# EAGLE board Board_Com2 (EAGLE 8.2.1)
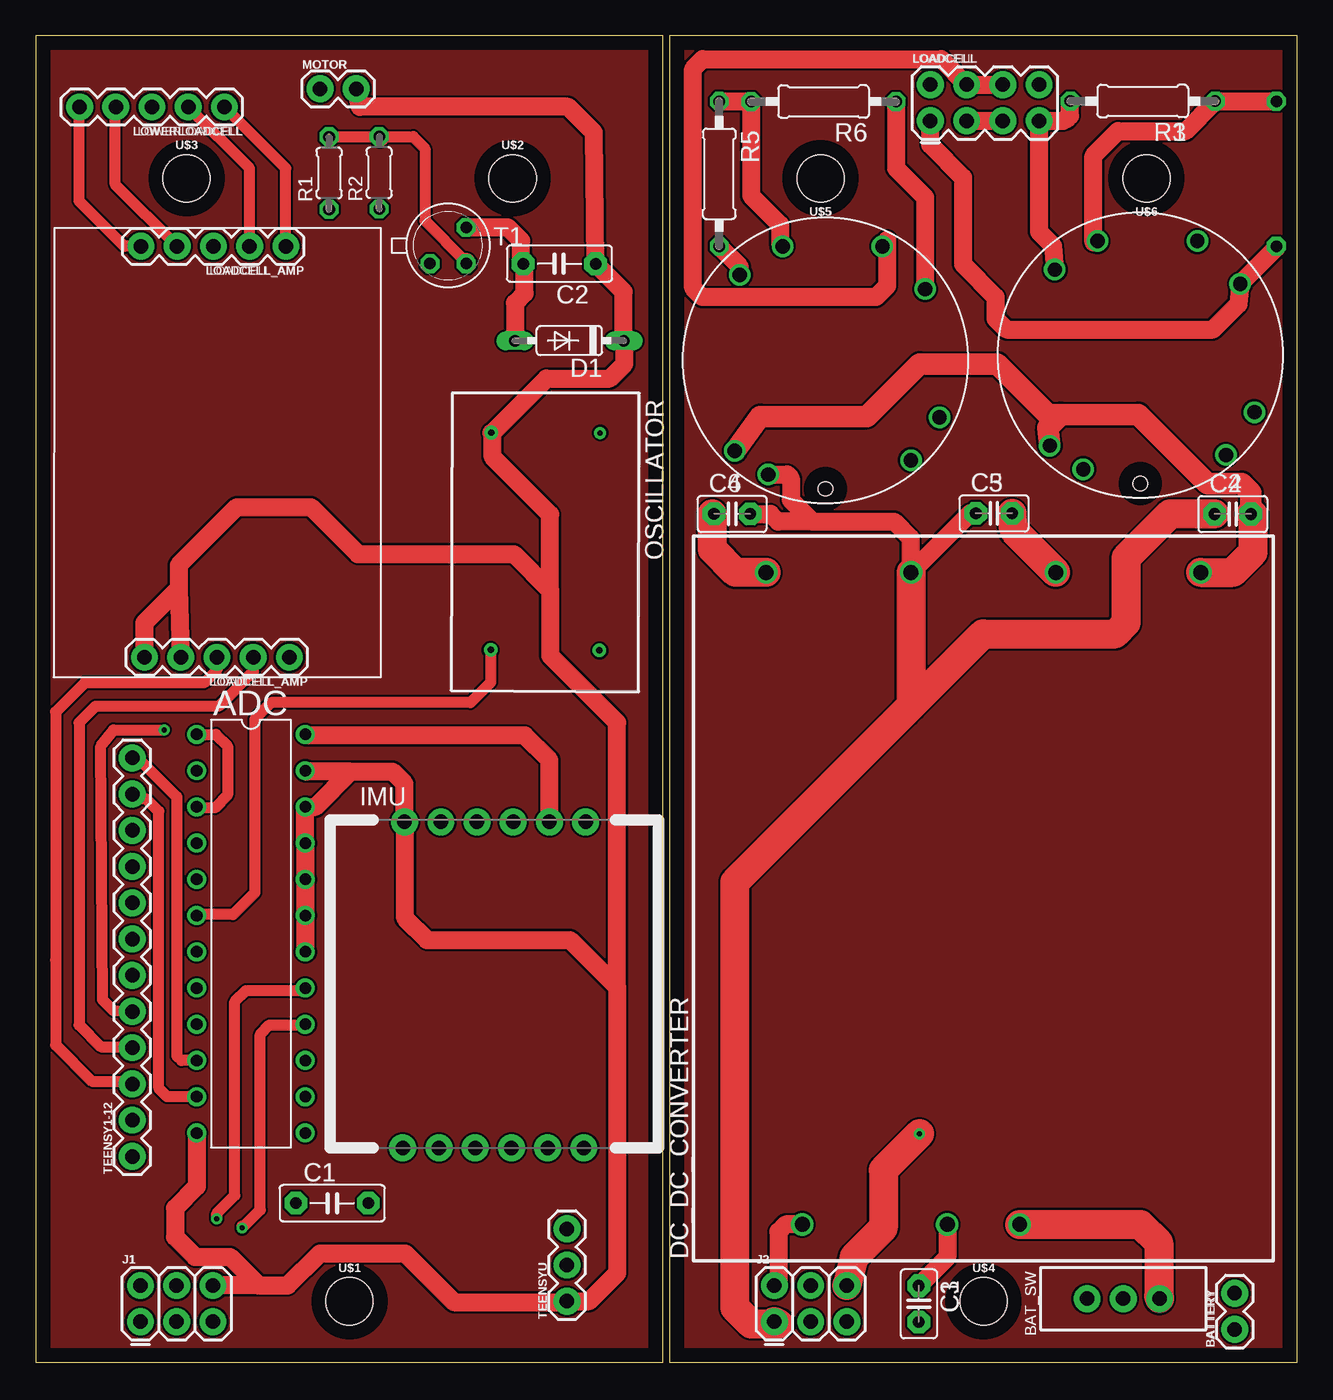
[diagram p0: board, top side]
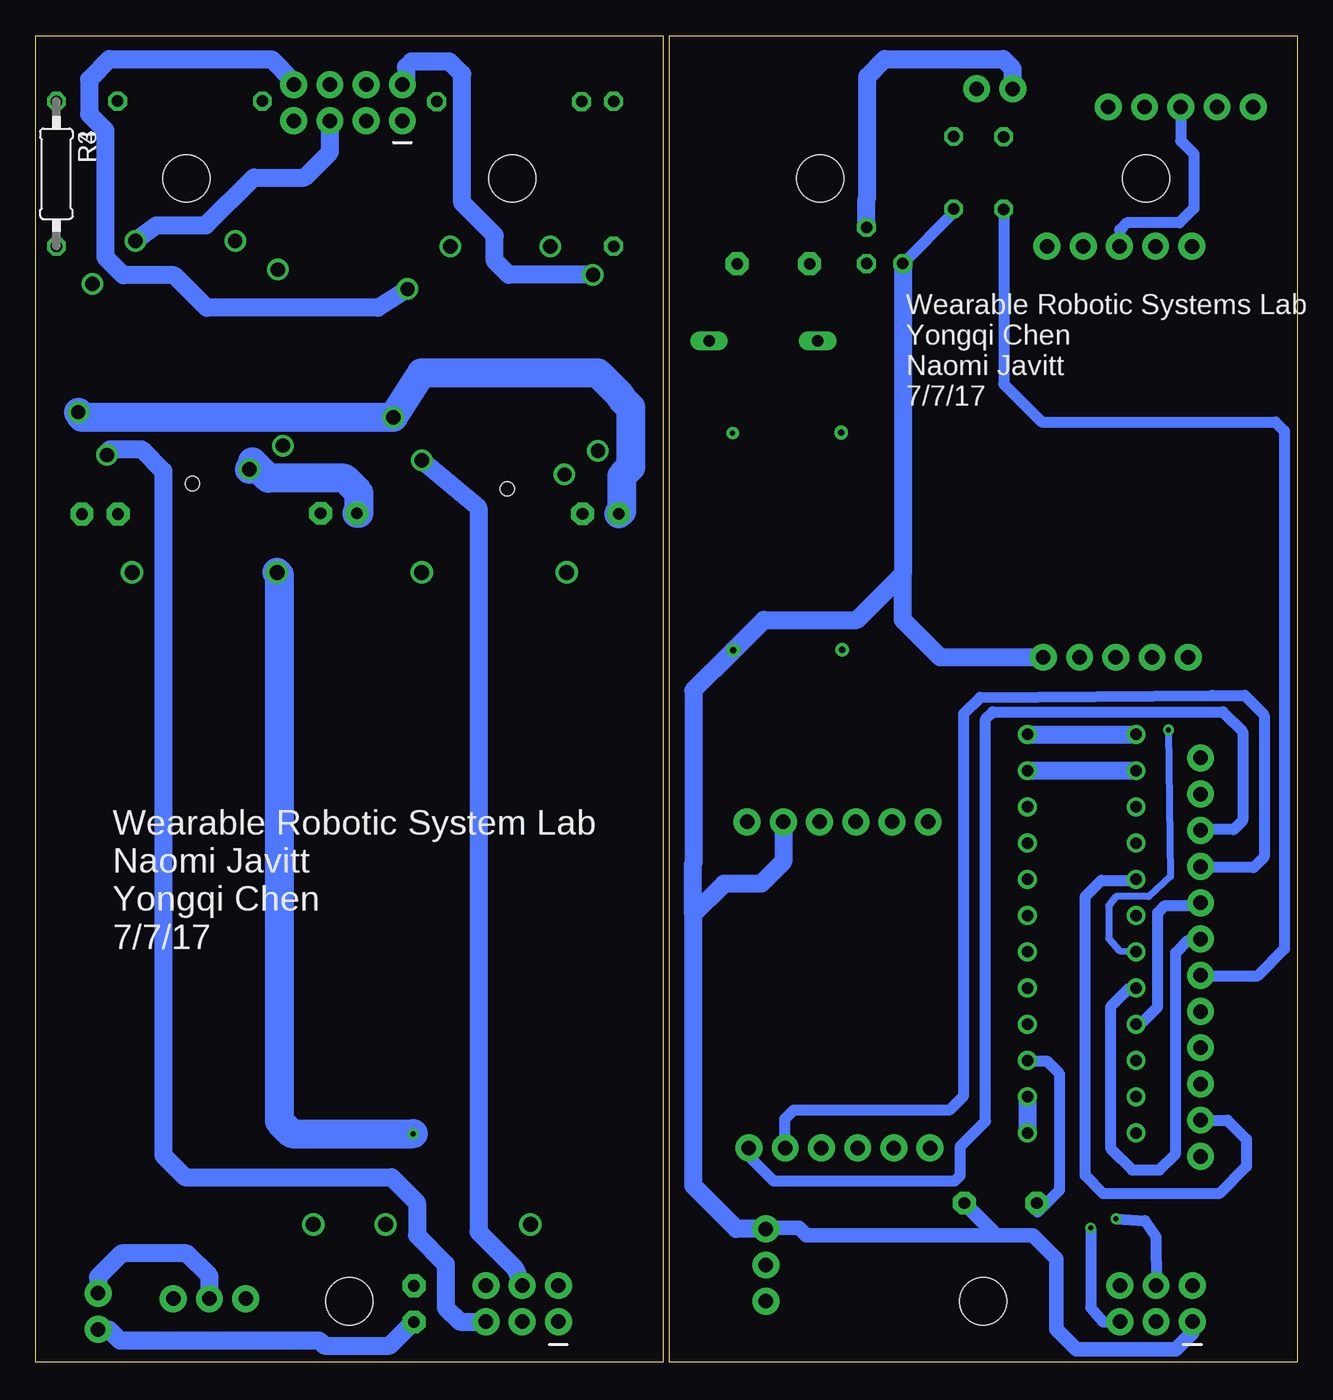
[diagram p1: board, bottom side, seen from below]

Size 88.45 x 93 mm. Coordinates in mm from the lower left corner, seen from the top.
Outline: 0,0 44,0 44,93 0,93 0,0
Outline: 44.45,0 88.45,0 88.45,93 44.45,93 44.45,0
Copper layers (1*16): Top 0.035mm / dielectric 1.5mm / Bottom 0.035mm
Design rules "default": minimum track width 6mil, minimum drill 0.35mm, track to track 6mil, track to pad 6mil, pad to pad 6mil, via to via 6mil, smd to smd 6mil, copper to edge 40mil, drill to drill 6mil, minimum pad ring 10mil, minimum via ring 8mil, stop-mask expansion 4mil, vias tented up to drill 0mil, thermal gap 10mil
Net classes: 2 powers: width 1.778 mm

## Footprints (pad centres in the part's own frame; a part is rotated, then mirrored left to right if it is on the bottom)
DIL24-3 = drill 0.813: 1 -13.97,-3.81; 2 -11.43,-3.81; 3 -8.89,-3.81; 4 -6.35,-3.81; 5 -3.81,-3.81; 6 -1.27,-3.81; 7 1.27,-3.81; 8 3.81,-3.81; 9 6.35,-3.81; 10 8.89,-3.81; 11 11.43,-3.81; 12 13.97,-3.81; 13 13.97,3.81; 14 11.43,3.81; 15 8.89,3.81; 16 6.35,3.81; 17 3.81,3.81; 18 1.27,3.81; 19 -1.27,3.81; 20 -3.81,3.81; 21 -6.35,3.81; 22 -8.89,3.81; 23 -11.43,3.81; 24 -13.97,3.81
SWITCH-SPDT = drill 1.016 pad 1.88: 1 0,2.54; 2 0,0; 3 0,-2.54
1X02 = drill 1.016 pad 1.88: 1 0,0; 2 2.54,0
C5B2.5 = drill 0.813 pad 1.6 octagon: 1 -2.54,0; 2 2.54,0
C2.5-2 = drill 0.813 pad 1.6 octagon: 1 -1.27,0; 2 1.27,0
DIODE_DO35-7 = drill 0.813 long: A 3.81,0; C -3.81,0
DC-DCCONVERTER = drill 1.05: 1 -22.86,-12.7; 2 -22.86,-7.62; 3 -22.86,2.54; 4 22.86,5.08; 5 22.86,-5.08; 6 22.86,-15.24; 7 22.86,-25.4
IMU = drill 1.016 pad 1.88: 1 22.86,-17.907; 2 22.86,-15.367; 3 22.86,-12.827; 4 22.86,-10.287; 5 22.86,-7.747; 6 22.86,-5.207; 7 0,-17.78; 8 0,-15.24; 9 0,-12.7; 10 0,-10.16; 11 0,-7.62; 12 0,-5.08
2X3 = drill 1.016 pad 1.88: 1 0,0; 2 0,2.54; 3 2.54,0; 4 2.54,2.54; 5 5.08,0; 6 5.08,2.54
2X4 = drill 1.016 pad 1.88: 1 -3.81,-1.27; 2 -3.81,1.27; 3 -1.27,-1.27; 4 -1.27,1.27; 5 1.27,-1.27; 6 1.27,1.27; 7 3.81,-1.27; 8 3.81,1.27
LOADCELLAMP2 = drill 1.016 pad 1.88: 1 -14.605,-5.08; 2 -14.605,-2.54; 3 -14.605,0; 4 -14.605,2.54; 5 -14.605,5.08; 6 14.213,-4.826; 7 14.213,-2.286; 8 14.213,0.254; 9 14.213,2.794; 10 14.213,5.334
1X05 = drill 1.016 pad 1.88: 1 0,0; 2 2.54,0; 3 5.08,0; 4 7.62,0; 5 10.16,0
ECS-100X = drill 0.35: 1 -7.62,3.81 | drill 0.45: 7 7.62,3.81; 8 7.61,-3.81; 14 -7.62,-3.81
0204/5 = drill 0.813 octagon: 1 -2.54,0; 2 2.54,0
0207/10 = drill 0.813 octagon: 1 -5.08,0; 2 5.08,0
TO18 = drill 0.813 octagon: 1 -1.27,-1.27; 2 1.27,-1.27; 3 1.27,1.27
1X12 = drill 1.016 pad 1.88: 1 0,0; 2 2.54,0; 3 5.08,0; 4 7.62,0; 5 10.16,0; 6 12.7,0; 7 15.24,0; 8 17.78,0; 9 20.32,0; 10 22.86,0; 11 25.4,0; 12 27.94,0
1X03 = drill 1.016 pad 1.88: 1 0,0; 2 2.54,0; 3 5.08,0
STAND-OFF = hole 3.302: 0,0
ICA3H = drill 1: 1 8,-4; 2 -6,-6; 3 -8,-3; 4 -8,4; 5 -5,7; 6 4,8; 7 7,6; P$1 6.35,-6.35 | hole 1: 9,0

## Placement (x,y rotation side)
ADC  AD7890-10  [DIL24-3]  15.1,30.04 270 top
BAT_SW  [SWITCH-SPDT]  76.26,4.45 270 top
BATTERY  [1X02]  84.07,2.29 90 top
C1  0.1 uf  [C5B2.5]  20.79,11.14 0 top
C2  0.1uf  [C5B2.5]  36.73,77.01 180 top
C3  [C2.5-2]  61.93,4.08 270 top
C4  [C2.5-2]  83.94,59.46 0 top
C5  [C2.5-2]  67.2,59.51 0 top
C6  [C2.5-2]  48.84,59.47 0 top
D1  [DIODE_DO35-7]  37.42,71.61 180 top
DC_DC_CONVERTER  [DC-DCCONVERTER]  56.29,32.51 90 top
IMU  TSS-EM  [IMU]  20.66,15.01 90 top
J1  FEMALE 2x3  [2X3]  7.35,2.83 0 top
J2  FEMALE 2x3  [2X3]  51.8,2.83 0 top
LOADCELL  [2X4]  66.55,88.3 0 top
LOADCELL_AMP  HX711  [LOADCELLAMP2]  12.71,64.02 90 top
LOWERLOADCELL  [1X05]  13.24,88 180 top
MOTOR  [1X02]  19.94,89.27 0 top
OSCILLATOR  CLOCK-ECS-100X  [ECS-100X]  35.74,57.53 269.8 top
R1  1kohm  [0204/5]  20.57,83.37 90 top
R2  10kohm  [0204/5]  24.09,83.39 90 top
R3  350ohm  [0207/10]  77.63,88.41 180 top
R4  350ohm  [0207/10]  86.99,83.31 270 bottom
R5  350hm  [0207/10]  47.93,83.31 270 top
R6  350hm  [0207/10]  55.25,88.38 180 top
T1  2N2222  [TO18]  28.92,78.29 0 top
TEENSY1-12  [1X12]  6.77,14.42 90 top
TEENSYU  [1X03]  37.25,4.26 90 top
U$1  [STAND-OFF]  22.01,4.26 0 top
U$2  [STAND-OFF]  33.44,83 0 top
U$3  [STAND-OFF]  10.58,83 0 top
U$4  [STAND-OFF]  66.46,4.26 0 top
U$5  [STAND-OFF]  55.03,83 180 top
U$6  [STAND-OFF]  77.89,83 180 top
UPP_LC_AMP1  ICA3H  [ICA3H]  77.46,70.6 270 top
UPP_LC_AMP2  ICA3H  [ICA3H]  55.37,70.23 270 top

## Library data of the parts
ADC DC_DC_CONVERTER IMU LOADCELL_AMP OSCILLATOR UPP_LC_AMP1 UPP_LC_AMP2 = Smartcrutches
BAT_SW = SparkFun-Electromechanical; PROD_ID: SWCH-08261
BATTERY LOADCELL LOWERLOADCELL MOTOR TEENSY1-12 TEENSYU = SparkFun-Connectors
C1-C6 = capacitor-wima
D1 = eagle-ltspice; SPICEMODEL: diode; SPICEPREFIX: D
J1 J2 = SparkFun-Connectors; PROD_ID: CONN-11566
R1 R2 = resistor
R3-R6 = eagle-ltspice; SPICEMODEL: NONE; SPICEPREFIX: R
T1 = transistor
U$1-U$6 = SparkFun-Hardware

## Nets
5V: ADC.2 ADC.12 ADC.18 ADC.19 ADC.20 ADC.21 ADC.22 ADC.23 C2.1 D1.C IMU.6 J1.6 LOADCELL_AMP.4 LOADCELL_AMP.5 MOTOR.2 OSCILLATOR.14 TEENSYU.1
5V1: C5.2 DC_DC_CONVERTER.6 J2.6
+15V: C4.2 DC_DC_CONVERTER.7 UPP_LC_AMP1.P$1 UPP_LC_AMP2.P$1
+EX1: LOADCELL.7 R3.2 UPP_LC_AMP1.2
+EX2: LOADCELL.2 R5.2 UPP_LC_AMP2.2
+SIG1: R3.1 R4.1 UPP_LC_AMP1.3
+SIG2: R5.1 R6.2 UPP_LC_AMP2.3
-15V: C6.1 DC_DC_CONVERTER.4 UPP_LC_AMP1.6 UPP_LC_AMP2.6
-EX1: LOADCELL.1 R4.2 UPP_LC_AMP1.5
-EX2: LOADCELL.8 R6.1 UPP_LC_AMP2.5
-SIG1: LOADCELL.3 LOADCELL.5 UPP_LC_AMP1.4
-SIG2: LOADCELL.4 LOADCELL.6 UPP_LC_AMP2.4
ADC-CH1: ADC.16 J1.5
ADC-CH2: ADC.17 J1.4
ADC-CLK: ADC.6 OSCILLATOR.8
ADC-CON: ADC.5 TEENSY1-12.2
ADC-DIN: ADC.11 TEENSY1-12.11
ADC-DOUT: ADC.10 TEENSY1-12.12
ADC-RFS: ADC.9 TEENSY1-12.8
ADC-SCLK: ADC.7 TEENSY1-12.5
ADC-TFS: ADC.8 TEENSY1-12.7
AMP-A+: LOADCELL_AMP.7 LOWERLOADCELL.2
AMP-A-: LOADCELL_AMP.8 LOWERLOADCELL.3
AMP-CLK: LOADCELL_AMP.2 TEENSY1-12.4
AMP-DAT: LOADCELL_AMP.3 TEENSY1-12.3
AMP-E+: LOADCELL_AMP.10 LOWERLOADCELL.5
AMP-E-: LOADCELL_AMP.9 LOWERLOADCELL.4
AMP-SD: LOADCELL_AMP.6 LOWERLOADCELL.1
CH1: J2.5 UPP_LC_AMP1.7
CH2: J2.4 UPP_LC_AMP2.7
DC-CTRL: J1.2
DC-CTRL1: DC_DC_CONVERTER.3 J2.2
GND [powers]: ADC.1 ADC.3 ADC.24 C1.2 IMU.2 J1.1 LOADCELL_AMP.1 OSCILLATOR.7 R2.1 T1.1 TEENSYU.3
GND1: C4.1 C5.1 C6.2 DC_DC_CONVERTER.5 J2.1 UPP_LC_AMP1.1 UPP_LC_AMP2.1
IMU-RX: IMU.7 TEENSY1-12.10
IMU-TX: IMU.8 TEENSY1-12.9
MOTOR: R1.1 TEENSY1-12.6
N$1: ADC.13 ADC.14
N$2: C3.1 DC_DC_CONVERTER.2
N$3: ADC.15 C1.1
N$4: BAT_SW.1 DC_DC_CONVERTER.1
N$5: BATTERY.1
N$6: C2.2 D1.A MOTOR.1 T1.3
N$7: BAT_SW.2 BATTERY.2
N$8: R1.2 R2.2 T1.2

## Tracks (layer width: path | path; a pad name or v marks a point on that pad's centre or on a via)
5V
  Top 1.27: ADC.18 ADC.19 ADC.20 ADC.21 ADC.22 19.62,38.92 22.1,41.4 | ADC.12 11.3,12.7 11.3,12.32 9.78,10.79 9.78,8.76 11.18,7.37 13.62,7.37 15.62,5.37 | 12.57,5.51 J1.6 15.62,5.37 | MOTOR.2 22.74,88.01 37.34,88.01 39.14,86.21 C2.1 41.23,75.04 D1.C 41.28,71.57 41.28,69.98 40.26,68.96 35.81,68.96 32.02,65.17 | 32.02,65.17 OSCILLATOR.14 | 15.62,5.37 17.68,5.37 19.94,7.62 25.91,7.62 29.34,4.19 37.18,4.19 TEENSYU.1 38.8,4.26 40.77,6.22 40.77,26.29 | 40.77,26.29 40.77,44.83 36.07,49.53 36.07,54.1 | 36.07,54.1 36.07,59.44 32.05,63.45 32.05,65.14 32.02,65.17 | 10.03,54.23 10.03,55.88 14.1,59.94 19.3,59.94 22.61,56.64 33.53,56.64 36.07,54.1 | 10.03,54.23 7.62,51.82 7.62,49.43 LOADCELL_AMP.5 | 10.03,54.23 10.16,49.55 LOADCELL_AMP.4 | 22.1,41.4 25.02,41.4 25.86,40.56 IMU.6 25.91,37.83 25.91,31.11 27.43,29.59 37.47,29.59 40.77,26.29 | 22.1,41.4 18.97,41.4 ADC.23
  Bottom 1.27: ADC.23 ADC.2
5V1  (via drill 0.35)
  Top 2.032: DC_DC_CONVERTER.6 68.59,58.31 C5.2 | v61.98,16 59.44,13.46 59.44,9.4 57.39,7.35 J2.6
  Bottom 2.032: DC_DC_CONVERTER.6 71.37,55.21 71.37,16.89 70.48,16 v61.98,16
+15V
  Top 1.524: UPP_LC_AMP2.P$1 50.8,66.29 58.29,66.29 61.98,69.98 67.44,69.98 70.98,66.43 71.88,66.43 | UPP_LC_AMP1.P$1 70.98,65.53 71.88,66.43 | 71.88,66.43 77.33,66.43 82.17,61.59 84.58,61.59 85.22,60.96 85.22,59.58 85.34,59.45
  Top 2.032: DC_DC_CONVERTER.7 83.95,55.37 85.34,56.77 85.34,59.45 C4.2
+EX1
  Top 1.27: UPP_LC_AMP1.2 71.33,78.27 70.36,79.25 LOADCELL.7 72.04,87.03 72.14,87.12 72.26,87.12 72.52,87.38 72.52,88.38 R3.2
+EX2
  Top 1.27: UPP_LC_AMP2.2 49.37,76.79 R5.2
  Bottom 1.27: UPP_LC_AMP2.2 55.28,76.23 56.26,77.22 56.26,78.99 58.55,81.28 58.55,90.3 59.44,91.19 62.1,91.19 62.48,90.81 62.48,89.82 LOADCELL.2
+SIG1
  Top 1.27: UPP_LC_AMP1.3 74.17,78.51 74.17,84.58 75.89,86.3 80.63,86.3 82.72,88.39 R3.1 86.98,88.41 R4.1
+SIG2
  Top 1.27: R5.1 50.15,88.39 R6.2 50.16,81.79 52.2,79.76 52.2,78.41 UPP_LC_AMP2.3
-15V
  Top 1.27: 47.45,59.46 C6.1
  Top 2.032: DC_DC_CONVERTER.4 49.08,55.37 47.45,57 47.45,59.46
  Bottom 2.032: C6.1 47.37,59.66 47.37,62.1 46.74,62.74 46.74,66.93 47.44,67.63 47.44,67.76 49.02,69.34 61.4,69.34 UPP_LC_AMP2.6 85.22,66.23 UPP_LC_AMP1.6
-EX1
  Top 1.27: LOADCELL.1 62.74,85.35 65.02,83.06 65.02,76.96 67.31,74.68 67.31,73.15 68.07,72.39 82.55,72.39 84.33,74.17 UPP_LC_AMP1.5 | UPP_LC_AMP1.5 84.33,75.57 | R4.2 86.99,78.14 UPP_LC_AMP1.5
-EX2
  Top 1.27: UPP_LC_AMP2.5 62.36,75.25 62.36,81.66 60.33,83.69 R6.1
  Bottom 1.27: UPP_LC_AMP2.5 64.45,73.91 76.45,73.91 78.74,76.2 82.3,76.2 83.57,77.47 83.57,86.36 84.71,87.5 84.71,89.92 83.28,91.35 83.24,91.31 71.88,91.31 70.36,89.79 LOADCELL.8
-SIG1
  Top 1.27: LOADCELL.3 LOADCELL.5
  Bottom 1.27: UPP_LC_AMP1.4 79.98,79.7 76.52,79.7 73.16,83.06 69.6,83.06 67.82,84.84 LOADCELL.5
-SIG2
  Top 1.27: LOADCELL.6 LOADCELL.4 63.5,91.35 46.77,91.35 46.1,90.68 46.1,75.31 46.74,74.68 58.93,74.68 59.69,75.44 59.69,78.67 UPP_LC_AMP2.4
ADC-CH1  (via drill 0.35)
  Top 0.762: 14.48,9.53 v14.48,9.4 15.75,10.67 15.75,22.99 16.38,23.62 18.84,23.62 ADC.16
  Bottom 0.762: v14.48,9.4 14.48,3.81 13.59,2.79 J1.5
ADC-CH2  (via drill 0.35)
  Top 0.762: 12.7,10.16 v12.7,10.03 12.7,10.41 13.97,11.68 13.97,25.27 14.73,26.04 18.72,26.04 ADC.17
  Bottom 0.762: v12.7,10.03 10.67,9.91 9.91,8.76 J1.4
ADC-CLK
  Top 0.762: ADC.6 11.35,31.37 13.84,31.37 15.37,32.89 15.37,45.09 16.51,46.23 30.48,46.23 31.9,47.65 OSCILLATOR.8
ADC-CON
  Bottom 0.762: TEENSY1-12.2 4.89,16.96 3.56,15.62 3.56,13.72 5.46,11.81 13.59,11.81 14.86,13.08 14.86,32.64 13.72,33.78 11.35,33.78 ADC.5
ADC-DIN
  Top 0.762: ADC.11 9.21,18.61 8.64,19.18 8.64,38.61 7.75,39.5 7.09,39.5 TEENSY1-12.11
ADC-DOUT
  Top 0.762: ADC.10 10.22,21.14 9.91,21.46 9.91,39.62 7.17,42.36 TEENSY1-12.12
ADC-RFS
  Bottom 0.762: ADC.9 10.99,23.68 9.78,24.89 9.78,31.5 9.27,32 6.97,32 TEENSY1-12.8
ADC-SCLK  (via drill 0.35)
  Top 0.762: TEENSY1-12.5 5.46,24.64 4.7,25.4 4.57,43.18 5.46,44.32 v9.02,44.32
  Bottom 0.508: v9.02,44.32 8.89,34.04 10.41,32.64 12.7,32.64 13.21,32 13.21,29.72 12.45,28.83 ADC.7
ADC-TFS
  Bottom 0.762: ADC.8 11.75,26.23 13.08,24.89 13.08,14.99 11.56,13.46 9.65,13.46 8.51,14.61 8.51,28.7 7.62,29.59 6.84,29.59 TEENSY1-12.7
AMP-A+
  Top 0.762: LOADCELL_AMP.7 15,83.7 LOWERLOADCELL.2
AMP-A-
  Bottom 0.762: LOWERLOADCELL.3 8.16,85.63 7.24,84.71 7.24,80.9 8.26,79.88 11.94,79.88 12.45,79.38 12.45,78.24 LOADCELL_AMP.8
AMP-CLK
  Top 0.762: LOADCELL_AMP.2 15.25,48.4 12.83,45.97 4.19,45.97 3.05,44.83 3.05,23.62 4.57,22.1 6.71,22.1 TEENSY1-12.4
AMP-DAT
  Top 0.508: TEENSY1-12.3 6.46,19.81
  Top 0.762: LOADCELL_AMP.3 12.71,48.53 11.81,47.62 3.43,47.62 1.4,45.59 1.4,28.19 1.4,22.23 3.94,19.68 6.59,19.68 TEENSY1-12.3
AMP-E+
  Top 0.762: LOADCELL_AMP.10 6.22,78.23 3.05,81.41 3.05,87.97 LOWERLOADCELL.5
AMP-E-
  Top 0.762: LOADCELL_AMP.9 5.59,82.55 5.59,87.97 LOWERLOADCELL.4
AMP-SD
  Top 0.762: LOADCELL_AMP.6 17.54,83.7 LOWERLOADCELL.1
CH1
  Bottom 1.27: UPP_LC_AMP1.7 83.23,64.01 81.03,64.01 79.5,62.48 79.5,14.48 77.98,12.95 63.5,12.95 61.72,11.18 61.72,8.89 59.69,6.86 59.69,3.81 58.71,2.83 J2.5
CH2
  Bottom 1.27: UPP_LC_AMP2.7 57.4,59.9 57.4,9.14 54.84,6.58 J2.4
DC-CTRL1
  Top 1.27: DC_DC_CONVERTER.3 52.58,9.65 52.07,9.14 52.07,5.6 J2.2
GND
  Top 0.762: ADC.1 12.64,44.01 13.46,43.18 13.46,39.75 12.57,38.86 11.35,38.86 ADC.3
  Top 1.27: IMU.2 36.03,42.21 34.29,43.94 18.97,43.94 ADC.24
  Bottom 0.762: R2.1 24.09,80.58 T1.1
  Bottom 1.016: J1.1 7.35,2.05 8.51,0.89 15.49,0.89 16.89,2.29 16.89,7.24 18.54,8.89 21.34,8.89 | 21.34,8.89 34.42,8.89 34.93,9.4 37.19,9.4 TEENSYU.3 | 21.34,8.89 21.34,9.14 C1.2
  Bottom 1.27: TEENSYU.3 39.31,9.34 42.35,12.38 42.35,31.37 | ADC.24 ADC.1 | IMU.2 36.03,35.09 37.59,33.53 40.19,33.53 42.35,31.37 | T1.1 27.65,55.24 | 27.65,55.24 27.65,52.03 25.02,49.4 LOADCELL_AMP.1 | 27.65,55.24 30.86,52.03 37.39,52.03 OSCILLATOR.7 42.35,47.08 42.29,47.02 42.29,35.05 42.35,34.99 42.35,31.37
GND1
  Top 1.27: C6.2 51.53,59.47 52.07,58.93 54.48,58.93 | 54.48,58.93 60.2,58.93 61.34,57.78 61.34,55.4 DC_DC_CONVERTER.5 65.51,59.51 C5.1 | UPP_LC_AMP2.1 52.7,62.23 52.96,61.98 52.96,60.45 54.48,58.93
  Top 2.032: J2.1 52.15,2.67 50.16,2.67 49.02,3.81 49.02,33.66 60.96,45.59 61.37,46.01 | C4.1 79.52,59.46 76.45,56.39 76.45,51.82 75.69,51.05 66.42,51.05 61.37,46.01 | DC_DC_CONVERTER.5 61.37,46.01
  Bottom 2.032: C5.1 65.79,59.52 65.79,60.96 66.8,61.98 72.14,61.98 73.27,63.11 UPP_LC_AMP1.1
IMU-RX
  Bottom 0.762: IMU.7 38.44,14.44 36.7,12.7 24,12.7 23.62,13.08 23.62,15.11 21.84,16.89 21.84,45.09 21.34,45.59 5.21,45.59 3.81,44.2 3.81,37.97 4.45,37.34 6.71,37.34 TEENSY1-12.10
IMU-TX
  Bottom 0.762: TEENSY1-12.9 6.7,34.67 3.05,34.67 2.31,35.41 2.31,45.36 3.68,46.74 5.97,46.74 22.22,46.61 23.37,45.47 23.37,18.67 24.38,17.65 35.31,17.65 35.94,17.02 35.94,15.05 IMU.8
MOTOR
  Bottom 0.762: TEENSY1-12.6 6.7,27.05 2.79,27.05 0.89,28.96 0.89,65.28 1.52,65.91 17.91,65.91 20.57,68.58 R1.1
N$1
  Bottom 1.27: ADC.14 ADC.13
N$2
  Top 1.27: DC_DC_CONVERTER.2 63.91,7.33 C3.1
N$3
  Bottom 0.762: C1.1 18.2,10.51 16.64,12.06 16.64,20.19 17.53,21.08 18.84,21.08 ADC.15
N$4
  Top 2.032: DC_DC_CONVERTER.1 77.47,9.65 78.74,8.38 78.74,4.63 BAT_SW.1
N$5
  Bottom 1.27: BATTERY.1 83.31,2.29 82.55,1.52 68.58,1.52 68.2,1.14 63.63,1.14 61.98,2.79
N$6
  Top 1.27: T1.3 33.09,79.56 34.04,78.61 34.04,77.16 C2.2 34.29,76.91 34.29,74.93 33.61,74.25 D1.A
  Bottom 1.27: MOTOR.1 19.94,90.68 20.61,91.35 28.92,91.35 30.14,90.13 30.14,81.63 30.19,81.58 T1.3
N$7
  Bottom 1.27: BAT_SW.2 76.26,6.03 77.85,7.62 82.42,7.62 84.07,5.97 BATTERY.2
N$8
  Top 0.762: 30.19,77.13 27.3,80.01 27.3,85.09 26.46,85.93 R2.2 24.06,85.91 R1.2
  Top 1.27: T1.2 30.19,77.13 | 24.16,85.85 R2.2 | 20.6,85.93 R1.2
S$1
  pour Top: -0.13,0 -0.13,93.09 88.65,93.09 88.65,-0.13 -0.13,-0.13

## Text on the board
_tPlace: IMU
_bsilk: Wearable Robotic Systems Lab / Yongqi Chen / Naomi Javitt / 7/7/17 | Wearable Robotic System Lab / Naomi Javitt / Yongqi Chen / 7/7/17
_tNames: MOTOR | LOADCELL | LOWERLOADCELL | R6 | R1 | R5 | U$3 | U$2 | R1 | R2 | U$5 | U$6 | T1 | LOADCELL_AMP | C2 | D1 | OSCILLATOR | C4 | C3 | C2 | LOADCELL_AMP | ADC | TEENSY1-12 | C1 | J1 | DC_DC_CONVERTER | J2 | U$1 | C1 | U$4 | BAT_SW | TEENSYU | BATTERY
_bNames: R3